# Altium PCB LDR PCB.PcbDoc
Units mil, origin at the board's own origin, x right, y up, seen from the top; angles counter-clockwise.
Board outline 1930 x 1680 mil, 2 copper layers (Top Layer, Bottom Layer); 10 components, 6 nets, 22 pads, 0 vias.
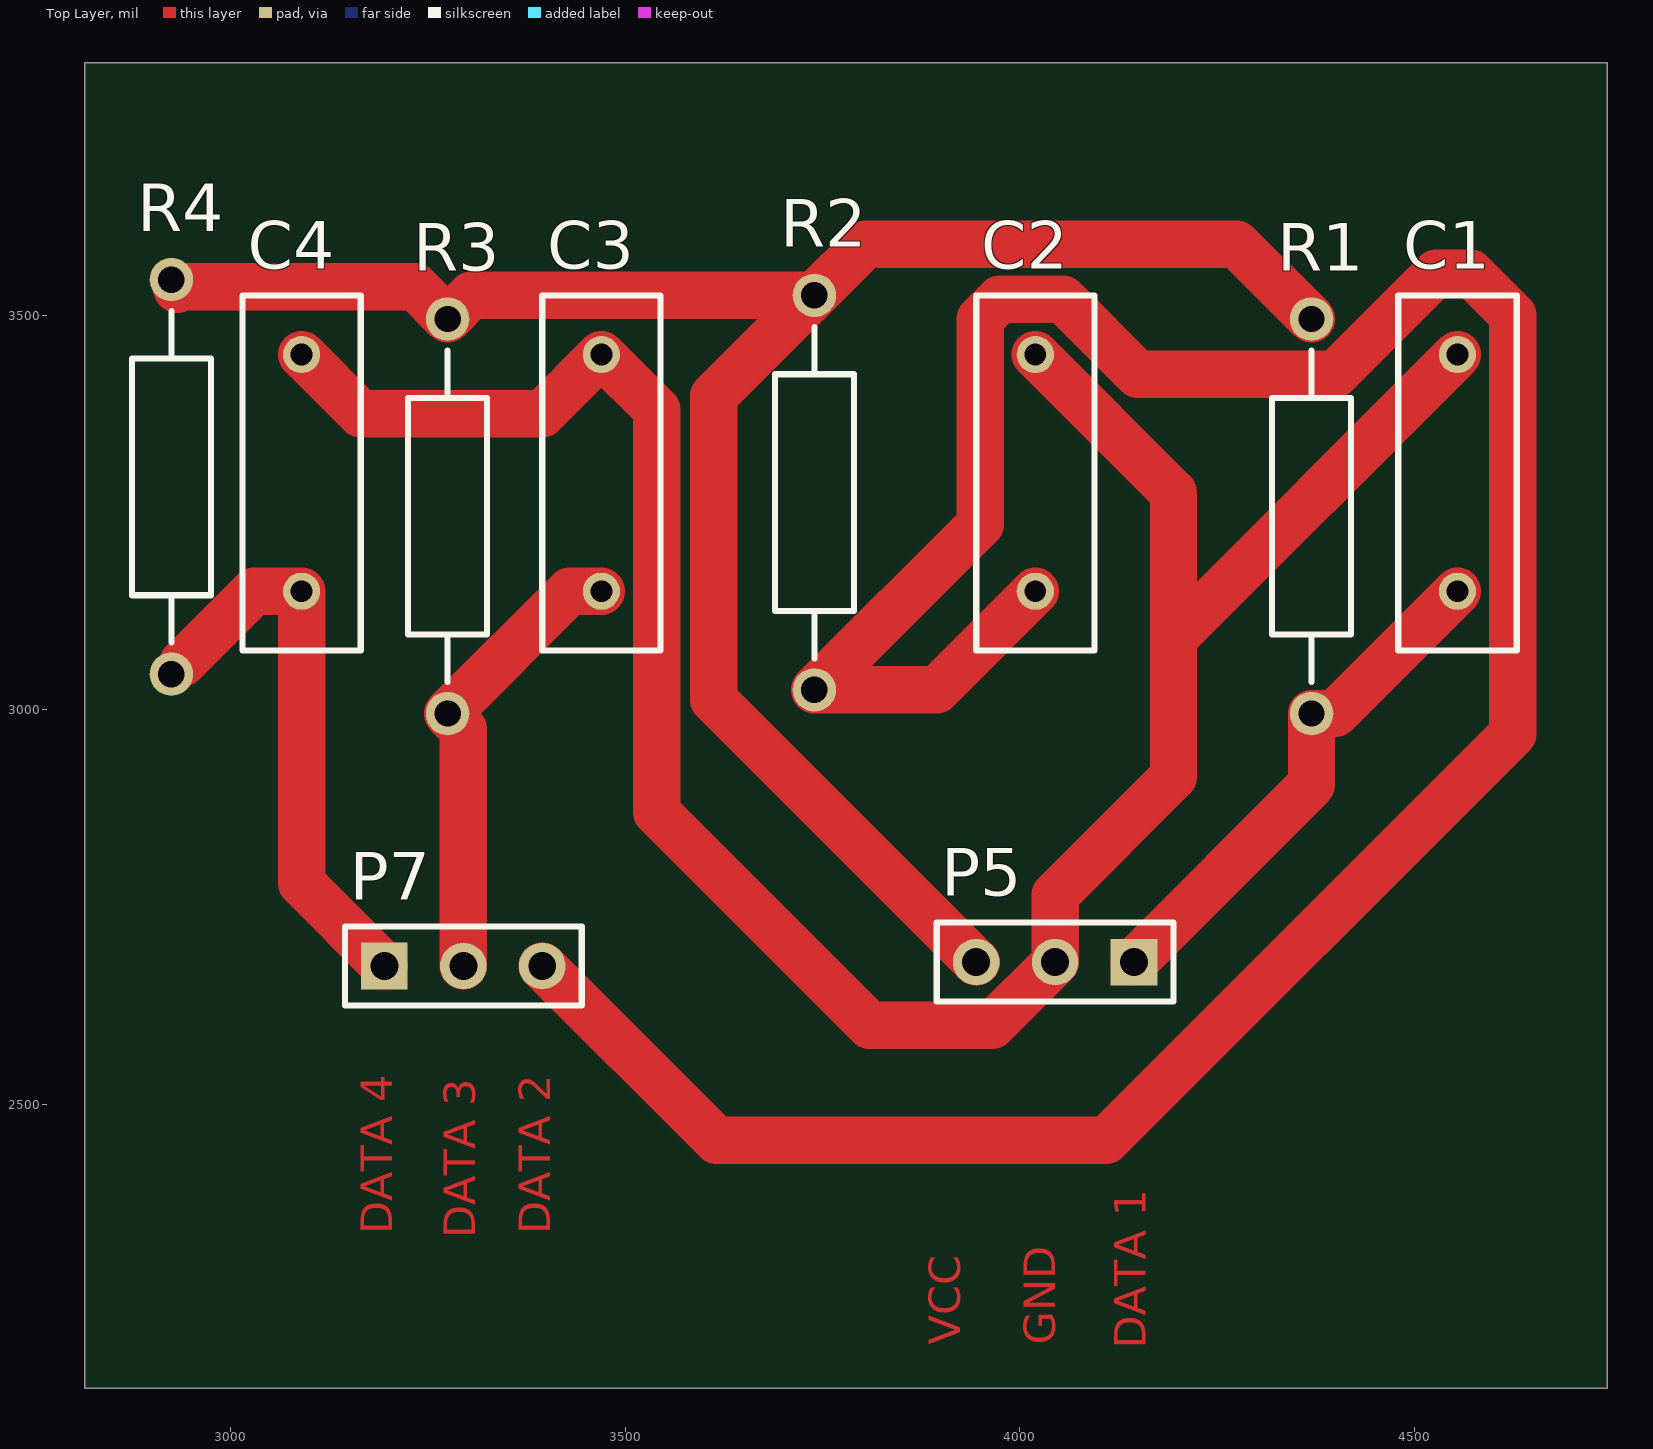
[diagram p0: Top Layer view]
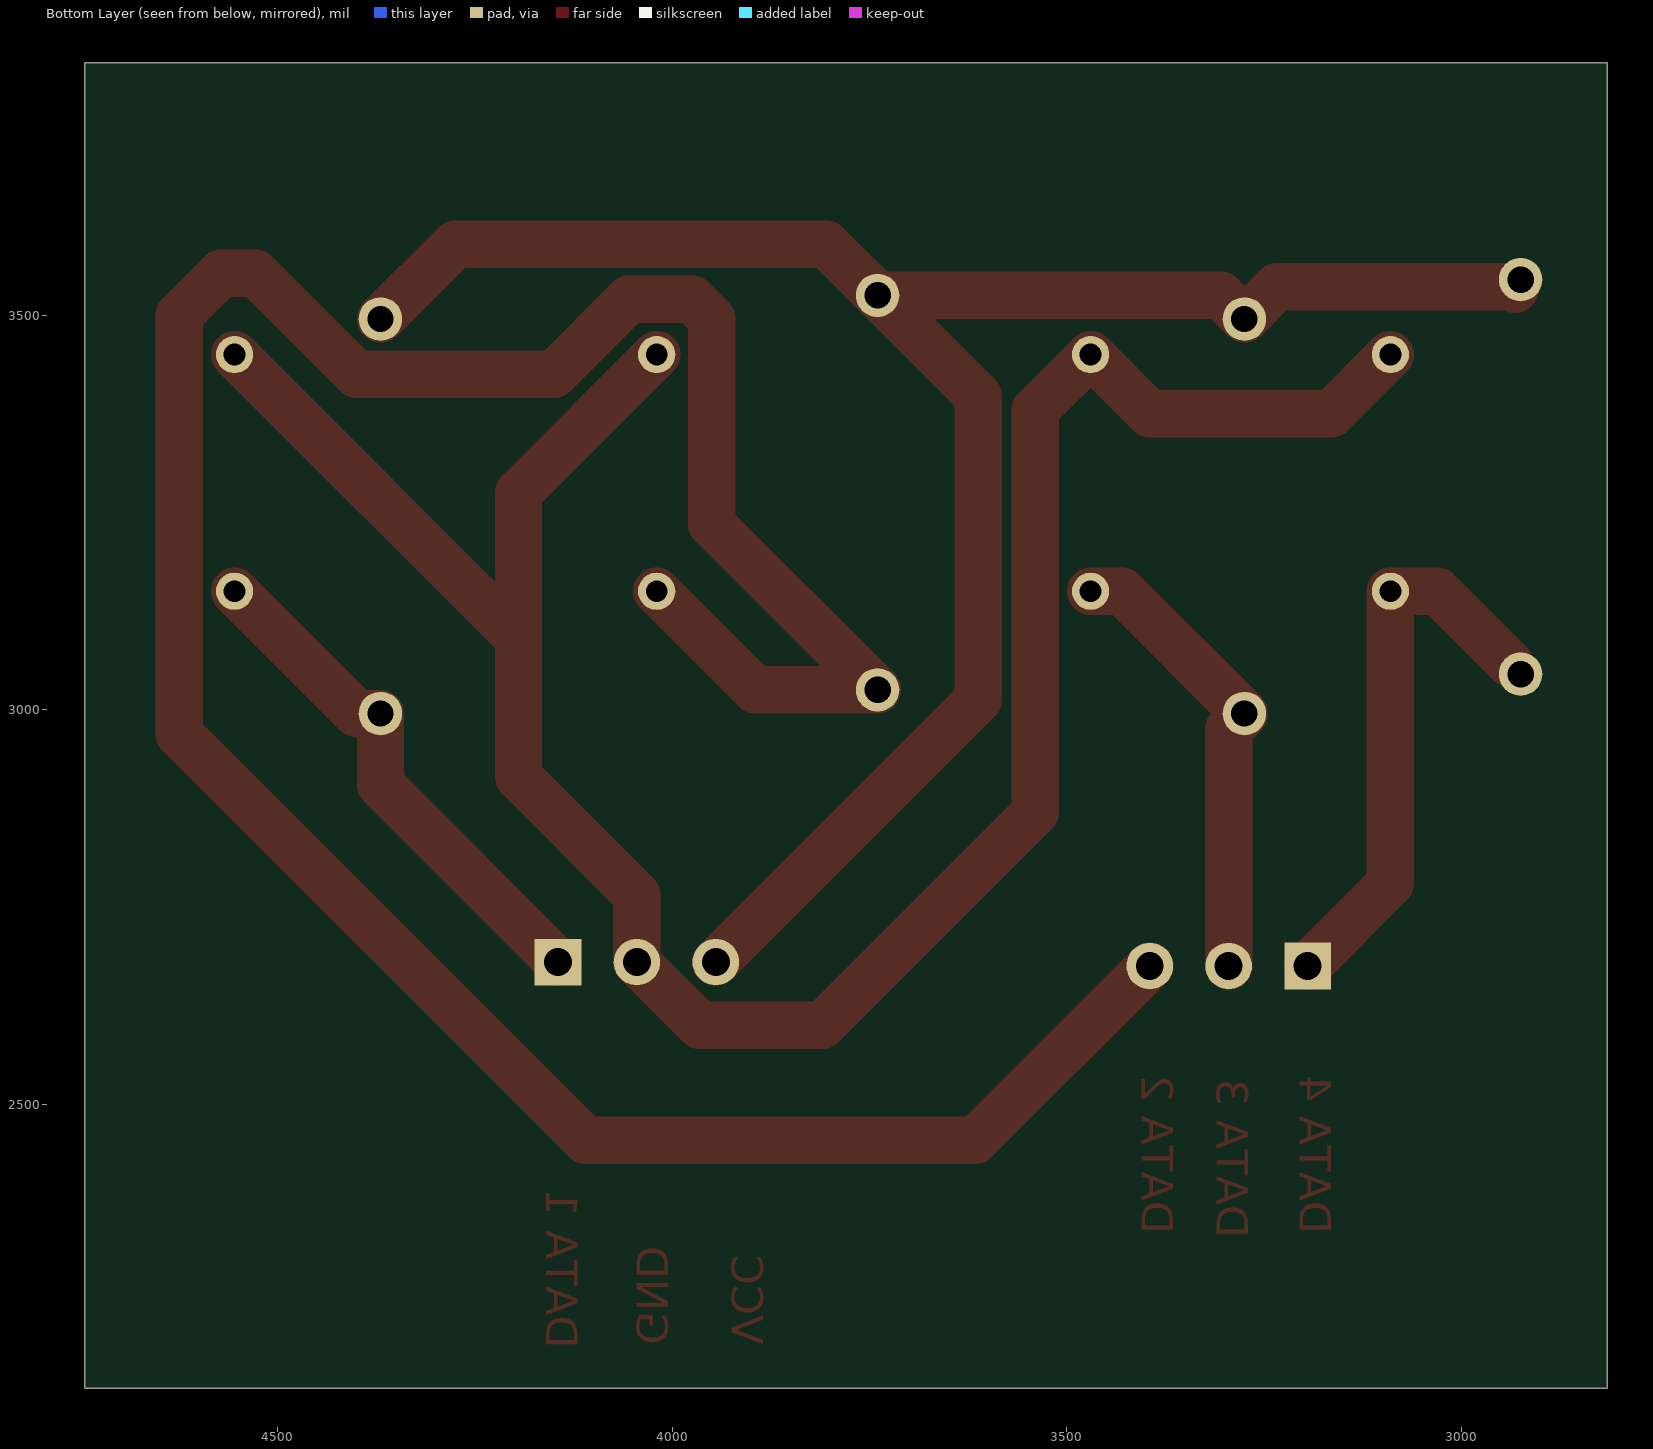
[diagram p1: Bottom Layer view, seen from below]

## Layer stack, top to bottom
Top Solder: solder mask 0.4, Solder Resist, Dk 3.5
Top Layer: signal copper 1.4
Dielectric 1: dielectric 12.6, FR-4, Dk 4.8
Bottom Layer: signal copper 1.4
Bottom Solder: solder mask 0.4, Solder Resist, Dk 3.5

## Board outline
2815,2140 4745,2140 4745,3820 2815,3820

## Design rules (kind name [scope] priority, off if disabled: settings)
Clearance [All] p1: gap=10
PolygonConnect [All] p1: connectstyle=Relief reliefconductorwidth=10 reliefentries=4 polygonreliefangle="90 Angle" airgapwidth=10
RoutingLayers [All] p1: top layer_v5=TRUE bottom layer_v5=FALSE
RoutingVias [All] p1: holewidth=28 width=50 viastyle="Through Hole" minholewidth=28 minwidth=50 maxholewidth=28 maxwidth=50
SolderMaskExpansion [All] p1: expansion=4
UnpouredPolygon [All] p1: allowunpoured=FALSE
Width [All] p1: maxlimit=60 minlimit=60 preferedwidth=60
28 further rules are at their usual default settings.

## Components (designator, comment, footprint, x,y, rotation, side; value= is the part's Value field where it differs from the comment)
C1 "Cap1" RAD-0.3 4555,3300 r90 top
C2 "Cap" RAD-0.3 4020,3300 r90 top
C3 "Cap" RAD-0.3 3470,3300 r90 top
C4 "Cap" RAD-0.3 3090,3300 r90 top
P5 "GND/VCC" HDR1X3 4145,2680 r180 top
P7 "LDR4" HDR1X3 3195,2675 r0 top
R1 "Res Semi" AXIAL-0.5 4370,3245 r90 top
R2 "Res Semi" AXIAL-0.5 3740,3275 r90 top
R3 "Res Semi" AXIAL-0.5 3275,3245 r90 top
R4 "Res Semi" AXIAL-0.5 2925,3295 r90 top

## Footprints (in the part's own frame and the unit in brackets; to place one, negate y for a bottom-side part, rotate by r counter-clockwise, add the part's x,y. Pads: shape width x height; smd on the part's side, far side on the other; paste and mask are expansions set on the pad)
AXIAL-0.5 [mm] "Axial Device, Thru-Hole; 2 Leads; 0.5 in Pin Spacing"
  round 1.4 hole 0.85: 1(-6.35,0) 2(6.35,0)
  silkscreen extent -5.33,-1.27 5.33,1.27
HDR1X3 [mm] "Connector; Header; 3 Position"
  rect 1.5x1.5 hole 0.9: 1(0,0)
  round 1.5 hole 0.9: 2(2.54,0) 3(5.08,0)
  silkscreen extent -1.27,-1.27 6.35,1.27
RAD-0.3 [mm] "Radial Cap, Thru-Hole; 2 Leads; 0.3 in Pin Spacing"
  round 1.2 hole 0.7: 1(-3.81,0) 2(3.81,0)
  silkscreen extent -5.71,-1.91 5.71,1.91

## Part data
C1: library part Cap, "Capacitor"
C2 C3 C4: "Capacitor"
P5 P7: library part "Header 3", "Header, 3-Pin"
R1 R2 R3 R4: "Semiconductor Resistor"

## Nets (pads, with @x,y where several pads share a name; then routed paths per layer and width w, separated by ;. In a path a pad name is that pad's centre, name@x,y a point inside that pad or via, vN(x,y) a via of type N, cw(c..) or ccw(c..) an arc to the next point about the centre after c; other vN are vias at no path point)
NetC1_1: C1.1 P5.1 R1.1 | length 657.4
  Top Layer w60: P5.1 4370,2905 R1.1 4400,2995 C1.1
NetC1_2: C1.2 C2.2 C3.2 C4.2 P5.2 | length 3114.8
  Top Layer w60: C4.2 3165,3375 3395,3375 C3.2 3540,3380 3540,2870 3810,2600 3965,2600 P5.2 4045,2765 4195,2915 4195,3090 ; C2.2 4195,3275 4195,3090 ; C1.2 4195,3090
NetC2_1: C2.1 P7.3 R2.1 | length 3754.3
  Top Layer w60: P7.3 3616,2454 4110,2454 4625,2969 4625,3500 4572,3553 4528,3553 4400,3425 4150,3425 4055,3520 3975,3520 3950,3495 3950,3235 R2.1 3895,3025 C2.1
NetC3_1: C3.1 P7.2 R3.1 | length 587.5
  Top Layer w60: P7.2 3295,2975 R3.1 3430,3150 C3.1
NetC4_1: C4.1 P7.1 R4.1 | length 705.8
  Top Layer w60: R4.1@2940,3060 3030,3150 C4.1 3090,2780 P7.1
NetP5_3: P5.3 R1.2 R2.2 R3.2 R4.2 | length 2570.2
  Top Layer w60: R4.2@2932.5,3532.5 2936,3536 3234,3536 R3.2 3305,3525 R2.2 ; P5.3 3612.5,3012.5 3612.5,3397.5 R2.2 ; R1.2 4275,3590 3805,3590 R2.2

## Other copper
Top Layer:
  text "DATA 4" at 3205,2335 h40 r90
  text "DATA 2" at 3405,2335 h40 r90
  text "DATA 3" at 3310,2330 h40 r90
  text "VCC" at 3925,2195 h40 r90
  text "GND" at 4045,2195 h40 r90
  text "DATA 1" at 4160,2190 h40 r90